# Altium PCB Copy of RT_SUPER_MK90.PCBdoc (part 3 of 3)
Units mil, origin at the board's own origin, x right, y up, seen from the top; angles counter-clockwise.
Board outline 1549.87 x 1549.87 mil, 4 copper layers (Top Layer, GND, PWR, Bottom Layer), stack 39.556 mil thick; 179 components, 119 nets, 506 pads, 207 vias.
Unrouted connection lines stored in the file: 7.
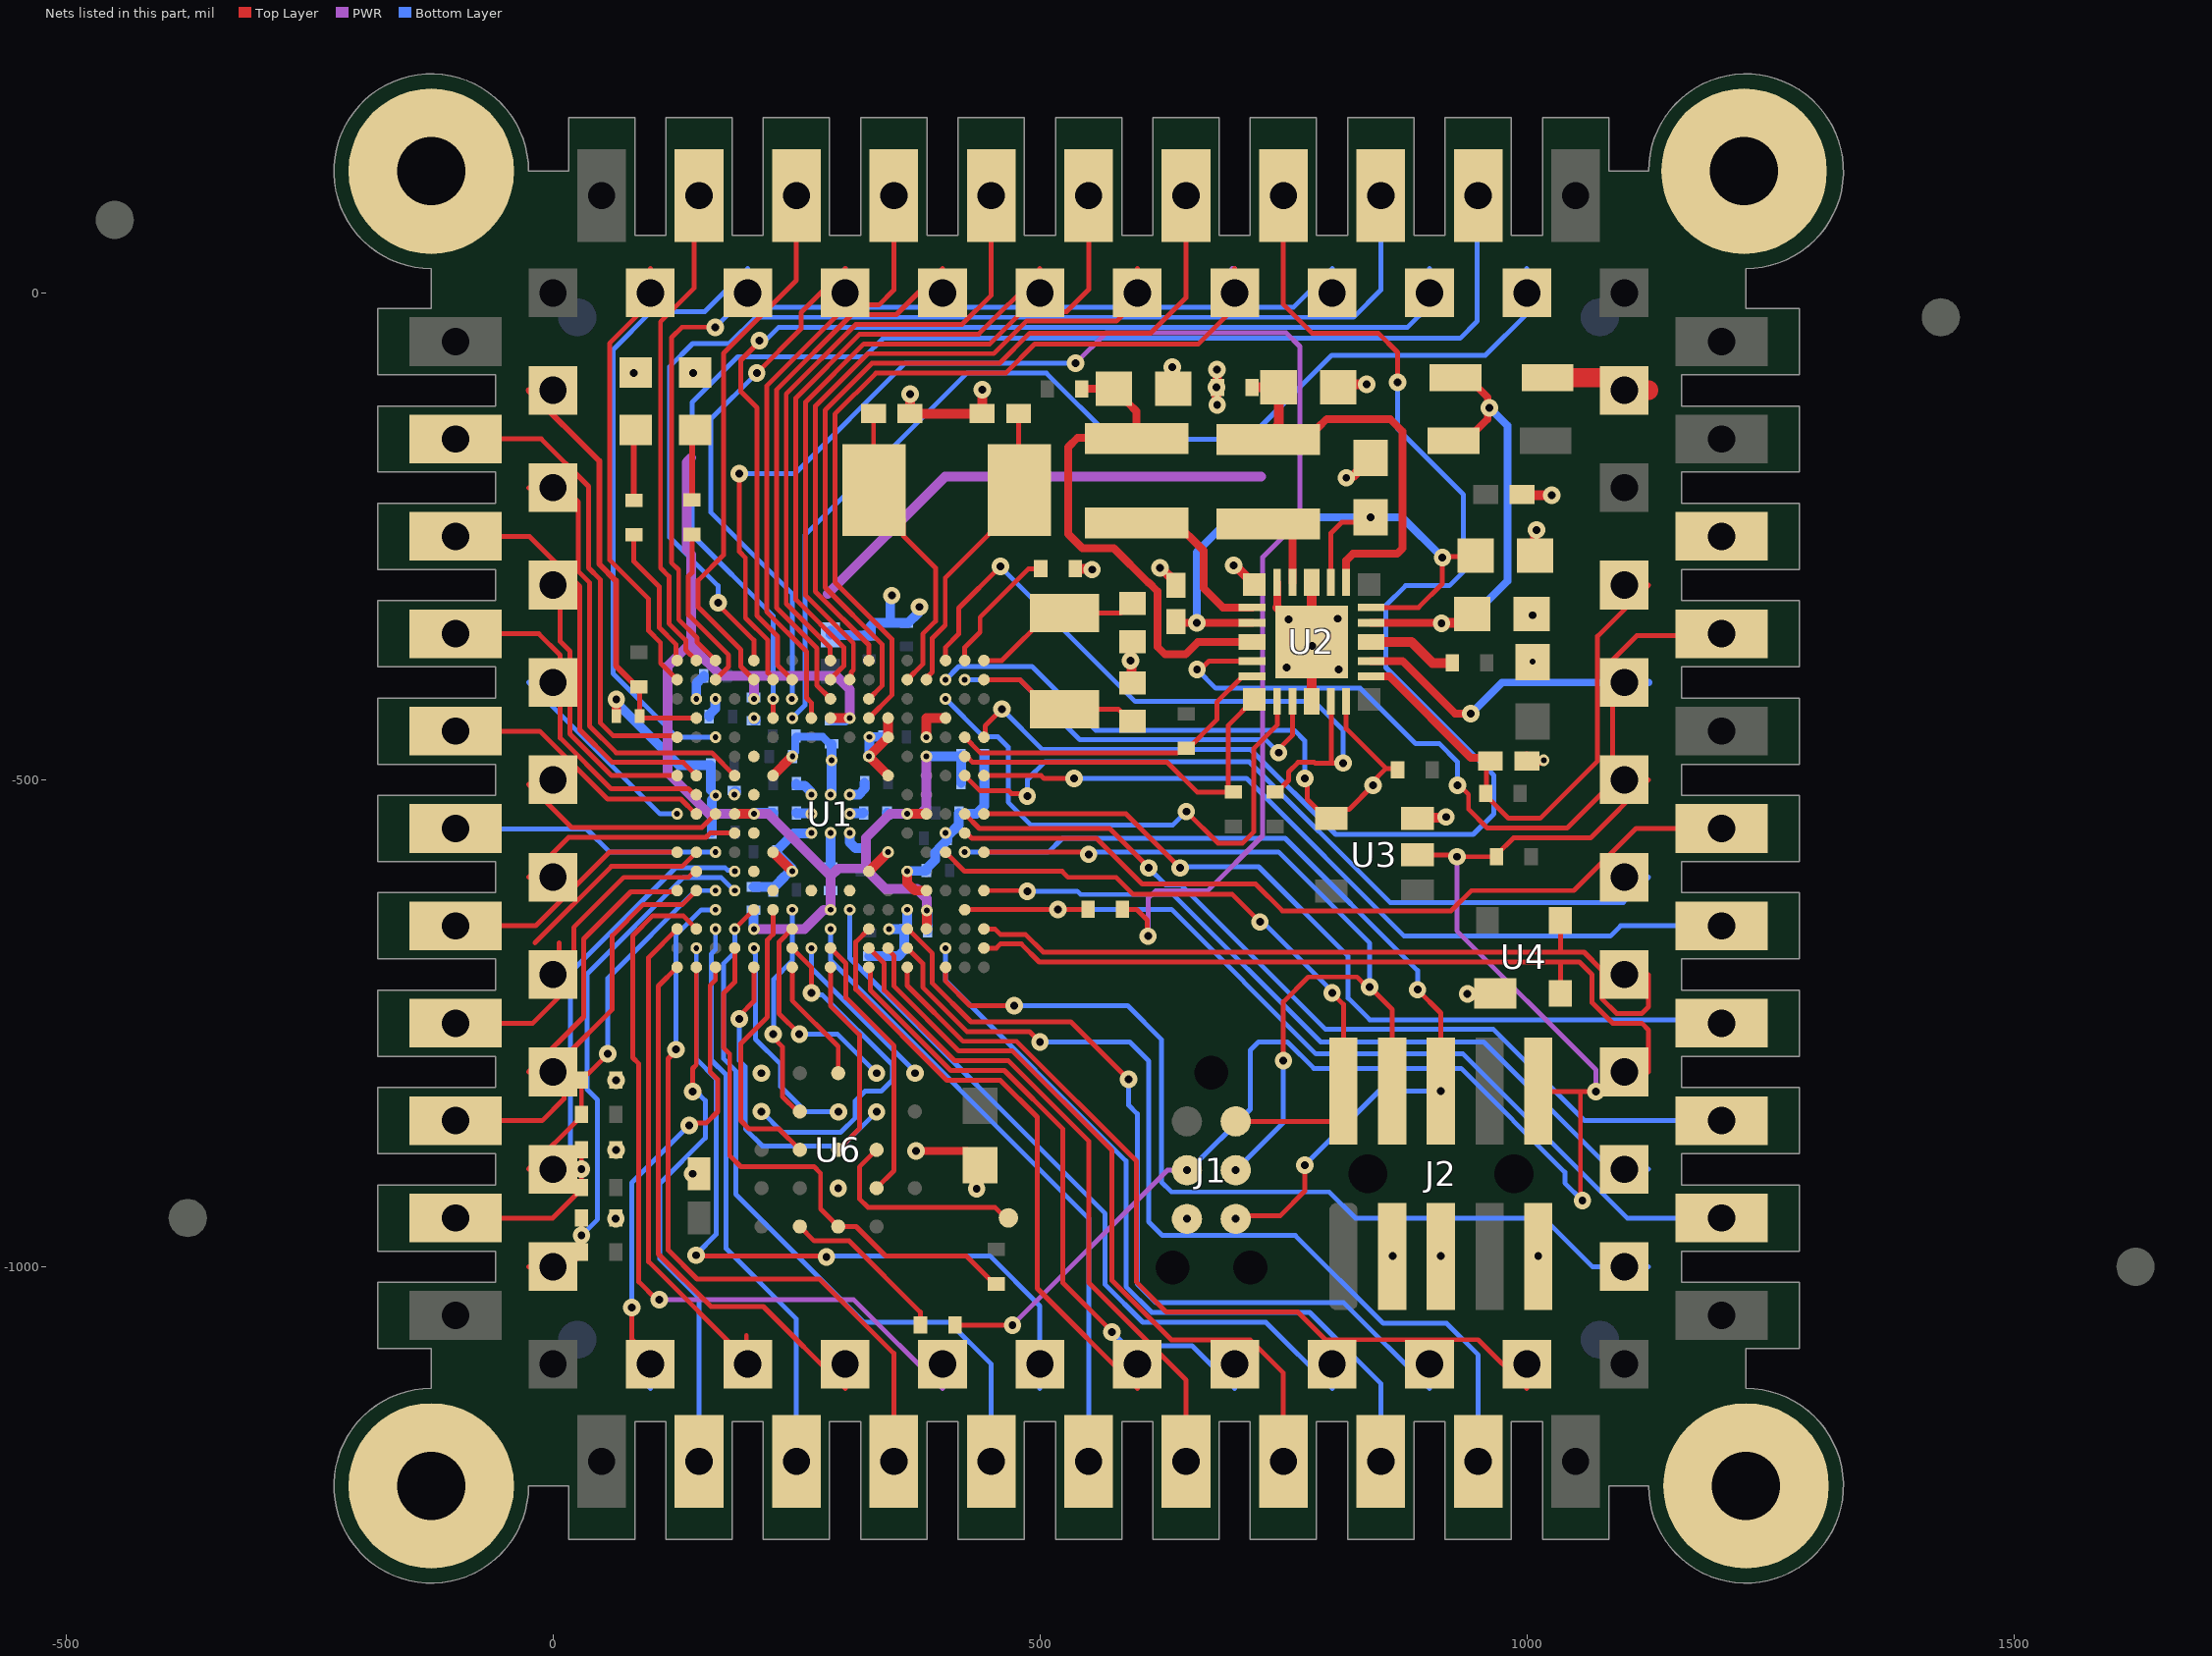
[diagram p4: the nets of this part, all layers, seen from the top]

## Via types
v1: diameter 18, hole 8, Top Layer to Bottom Layer, tented both sides, 124 vias
v2: diameter 12, hole 6, Top Layer to Bottom Layer, tented both sides, 83 vias

## Nets (pads, with @x,y where several pads share a name; then routed paths per layer and width w, separated by ;. In a path a pad name is that pad's centre, name@x,y a point inside that pad or via, vN(x,y) a via of type N, cw(c..) or ccw(c..) an arc to the next point about the centre after c; other vN are vias at no path point) (continued)
+VBATT_BU: C3.2 R6.1 T53.1 U2.13 | length 539.7
  Top Layer w5: C3.2@958.59,-482.13 958.59,-513.01 R6.1@957.6,-513.99 957.6,-515.96 981.22,-539.58 1013.56,-539.58 1072.49,-480.65 1072.49,-352.51 1125,-300
  Top Layer w8: U2.13@840,-393.82 858.9,-393.82 942.41,-477.34 953.73,-477.34 955.84,-479.45 C3.2@955.84,-482.13
+VIN: D1.1 T57.1 | length 109.1
  Top Layer w20: D1.1@1021.24,-87 1103.88,-87 1116.88,-100 1125,-100
+VREF: C6.2 R21.2 T1.1 U1.D2 | length 442
  Top Layer w5: R21.2@88.36,-404.45 89.04,-405.14 C6.2@89.04,-434.61 91.01,-436.57 U1.D2@147.2,-436.57
  Top Layer w6: T1.1@-25,-100 47.62,-172.62 47.62,-278.49 64.72,-295.58 64.72,-382.78 86.39,-404.45 R21.2@88.36,-404.45
ADC0_1: T74.1 U1.E3 | length 637.4
  Bottom Layer w5: v2(166.89,-456.11) 127.04,-456.11 61.83,-390.91 61.83,-58.17 101,-19 156,-19 200,25
ADC0_3: T75.1 U1.A2 | length 534.2
  Top Layer w5: U1.A2@147.2,-377.52 136.18,-366.5 136.18,-356.64 119.09,-339.54 119.09,-291.04 110.41,-282.37 110.41,-29.59 145.07,5.07 145.07,120.07 T75.1@150,125
ADC0_4: T73.1 U1.B5 | length 587.7
  Top Layer w5: U1.B5@206.26,-397.2 192.76,-383.7 192.76,-366.37 149.09,-322.7 149.09,-295.09 175,-269.18 175,-62 250,13 T73.1@250,125
ADC0_8: T2.1 U1.E1 | length 514.6
  Top Layer w5: T2.1@-122,-150 -12.03,-150 36.62,-198.65 36.62,-214.12 36.62,-282.34 48.53,-294.25 48.53,-441.49 61.97,-454.92 126.18,-454.92 U1.E1@127.52,-456.26
  Top Layer w6: T2.1@-125,-150 T2.1@-122,-150
ADC0_12: T76.1 U1.B1 | length 468.3
  Top Layer w5: 100,25 100,-10 58.12,-51.88 58.12,-274.14 98.16,-314.18 98.16,-346.9 110.41,-359.15 110.41,-380.1 U1.B1@127.52,-397.2
DM_MCU: T43.1 U1.T17 U4.2 | length 813.6
  Top Layer w5: U1.T17@442.48,-672.8 455.22,-672.8 459.37,-668.65 480.93,-668.65 499.35,-687.07 1032.78,-687.07 ; U4.2@1034.37,-719.37 1034.37,-688.67 1032.78,-687.07 ; 1125,-800 1125,-757.1 1117.9,-750 1088,-750 1066.79,-728.79 1066.79,-700 1053.86,-687.07 1032.78,-687.07
DP_MCU: T45.1 U1.R17 U4.3 | length 804.1
  Top Layer w5: U1.R17@442.48,-653.11 453.82,-653.11 459.37,-658.65 485.07,-658.65 503.49,-677.07 1034.37,-677.07 ; U4.3@1034.37,-644.56 1034.37,-677.07 ; 1125,-700 1125,-732.9 1117.9,-740 1092.14,-740 1076.79,-724.64 1076.79,-695.14 1058.72,-677.07 1034.37,-677.07
FC0_CLK: T5.1 U1.G1 | length 304.2
  Top Layer w5: T5.1@-14.71,-300 7.5,-322.21 7.5,-357.88 17.5,-367.88 17.5,-452.88 60.25,-495.63 U1.G1@127.52,-495.63 ; T5.1@0,-300 T5.1@10.29,-300
FC0_RXD: T3.1 U1.G4 | length 462
  Top Layer w5: T3.1@-25,-200 11.31,-200 26.12,-214.82 26.12,-285.98 37.5,-297.36 37.5,-444.6 65.03,-472.13 163.07,-472.13 U1.G4@186.57,-495.63
FC0_SSEL0: T6.1 U1.H2 | length 390.5
  Top Layer w5: T6.1@-125,-350 -14.53,-350 7.5,-372.03 7.5,-457.02 59.61,-509.13 139.13,-509.13 145.31,-515.32 U1.H2@147.2,-515.32
FC0_SSEL1: T7.1 U1.J1 | length 208.4
  Bottom Layer w5: T7.1@-25,-400 110,-535 v2(127.52,-535)
FC0_TXD: T4.1 U1.G2 | length 460.2
  Top Layer w5: T4.1@-125,-250 -24,-250 27.5,-301.5 27.5,-448.74 60.89,-482.13 133.7,-482.13 U1.G2@147.2,-495.63
FC1_CLK: T8.1 U1.J2 | length 307.4
  Top Layer w5: T8.1@-125,-450 -13.66,-450 56.07,-519.73 131.34,-519.73 146.61,-535 U1.J2@147.2,-535
FC1_RXD: T10.1 U1.L3 | length 302
  Bottom Layer w5: T10.1@-125,-550 -124.52,-550.48 34.52,-550.48 58.41,-574.37 v2(166.89,-574.37)
FC1_SSEL0: T9.1 U1.J3 | length 220.7
  Top Layer w5: T9.1@-25,-504.69 19.31,-549 152.89,-549 U1.J3@166.89,-535 ; T9.1@0,-504.69 T9.1@0,-500
FC1_SSEL1: T12.1 U1.L1 | length 283.8
  Top Layer w5: T12.1@-125,-650 -17.83,-650 57.8,-574.37 U1.L1@127.52,-574.37
FC1_TXD: T11.1 U1.K4 | length 230.3
  Top Layer w5: T11.1@-25,-600 16,-559 157.03,-559 161.35,-554.69 U1.K4@186.57,-554.69
FC2_CLK: T62.1 U1.A3 | length 1058.5
  Top Layer w5: v1(166.51,-35.52) 166.07,-35.08 132.45,-35.08 121.63,-45.9 121.63,-276.92 129.09,-284.37 129.09,-335.4 147.98,-354.29 147.98,-358.61 U1.A3@166.89,-377.52
  Bottom Layer w5: v1(166.51,-35.52) 187.5,-14.53 760.47,-14.53 800,25
FC2_SDA: T59.1 U1.D6 | length 1353.5
  Top Layer w5: U1.D6@225.94,-436.57 v2(225.94,-416.89)
  Bottom Layer w5: v2(225.94,-416.89) 225.94,-331.6 142.97,-248.63 142.97,-112.39 189.84,-65.51 320.06,-65.51 339.04,-46.52 931.34,-46.52 948.84,-29.02 948.84,123.84 T59.1@950,125
FC2_SSEL0: T58.1 U1.D7 | length 1131.5
  Bottom Layer w5: v2(245.63,-436.57) 258.66,-423.54 258.66,-248.66 425,-82.32 506.76,-82.32 574.68,-150.24 713.48,-150.24 799.72,-64 957.53,-64 1000,-21.53 1000,25
FC2_SSEL1: T60.1 U1.B7 | length 1118.8
  Top Layer w5: v1(212.04,-49.01) 212.04,-49.92 192.76,-69.2 192.76,-101.18 209.47,-117.89 209.47,-331.48 230.7,-352.71 230.7,-382.27 U1.B7@245.63,-397.2
  Bottom Layer w5: v1(212.04,-49.01) 214.52,-46.52 220.46,-46.52 231.46,-35.52 877.2,-35.52 900,-12.72 900,25
FC2_WS: T61.1 U1.A5 | length 1222.5
  Top Layer w5: v1(169.47,-318.19) 169.47,-319.77 206.26,-356.56 U1.A5@206.26,-377.52
  Bottom Layer w5: v1(169.47,-318.19) 169.47,-300.61 119.87,-251.02 119.87,-75.52 143.38,-52.02 181.08,-52.02 208.1,-25 822.1,-25 850,2.9 T61.1@850,125
FC3_CLK: T72.1 U1.C7 | length 545.1
  Top Layer w5: v1(209.26,-82.32) 254.9,-36.68 254.9,-20.1 300,25
  Bottom Layer w5: v1(209.26,-82.32) 162,-129.58 162,-225.27 245.63,-308.9 245.63,-416.42 v2(245.16,-416.89) ; T72.1@292.05,17.05 300,25
FC3_SDA: T70.1 U1.C9 | length 562.4
  Top Layer w5: U1.C9@285,-416.89 271,-402.89 271,-364.73 229.47,-323.2 229.47,-99.59 306.74,-22.32 352.68,-22.32 400,25
FC3_SSEL0: T68.1 U1.B9 | length 623.4
  Top Layer w5: U1.B9@285,-397.2 285,-396.61 298.5,-383.11 298.5,-363.94 249.47,-314.91 249.47,-107.87 315.02,-42.32 437.16,-42.32 500,20.52 500,25
FC3_SSEL1: T69.1 U1.A9 | length 672.6
  Top Layer w5: U1.A9@285,-377.52 284.43,-376.95 284.43,-364.02 239.47,-319.05 239.47,-103.73 310.88,-32.32 420.08,-32.32 450,-2.4 T69.1@450,125
FC3_WS: T71.1 U1.D8 | length 653.4
  Top Layer w5: U1.D8@265.32,-436.57 265.32,-420.78 260.39,-415.86 260.39,-368.26 219.47,-327.34 219.47,-95.45 302.59,-12.32 334.68,-12.32 350,3 T71.1@350,125
FC4_CLK: T64.1 U1.D11 | length 844.3
  Top Layer w5: U1.D11@324.37,-436.57 347.87,-413.07 347.87,-355.36 289.47,-296.96 289.47,-124.44 331.59,-82.32 464.82,-82.32 494.82,-52.32 662.7,-52.32 700,-15.02 700,25
  PWR w5: 697.6,25 700,25
FC4_SDA: T65.1 U1.C11 | length 874.7
  Top Layer w5: U1.C11@324.37,-416.89 337.87,-403.39 337.87,-360.89 279.47,-302.49 279.47,-120.3 327.45,-72.32 458.53,-72.32 489.6,-41.26 613.75,-41.26 650,-5.01 T65.1@650,125
FC4_SSEL0: T66.1 U1.A11 | length 692.2
  Top Layer w5: U1.A11@324.37,-377.52 324.37,-361.53 269.47,-306.63 269.47,-116.16 323.3,-62.32 452.66,-62.32 485.98,-29.01 578.55,-29.01 600,-7.56 600,25
FC4_SSEL1: T63.1 U1.E17 | length 1485.5
  Top Layer w5: U1.E17@442.48,-456.26 443.82,-454.92 443.82,-444.39 v1(460.93,-427.29) ; T63.1@750,125 750,-11.81 779.45,-41.26 847.44,-41.26 867.27,-61.09 v1(867.27,-91.87)
  Bottom Layer w5: v1(460.93,-427.29) 502.59,-468.94 716.56,-468.94 803.7,-556.08 944.93,-556.08 966.01,-535 966.01,-495.43 855.17,-384.59 855.17,-320.94 875.49,-300.61 920.39,-300.61 935,-286 935,-207.19 867.27,-139.46 v1(867.27,-91.87)
FC4_WS: T67.1 U1.B10 | length 767
  Top Layer w5: U1.B10@304.69,-397.2 306.02,-395.87 306.02,-389.73 308.5,-387.25 308.5,-359.8 259.47,-310.77 259.47,-112.02 319.16,-52.32 448.52,-52.32 481.84,-19.01 527.58,-19.01 550,3.42 T67.1@550,125
FC5_RXD: T42.1 U1.J16 | length 932.9
  Top Layer w5: U1.J16@422.8,-535 437.8,-550 571.61,-550 611.75,-590.14 v1(611.75,-590.51)
  Bottom Layer w5: v1(611.75,-590.51) 629,-607.76 644.73,-607.76 793.3,-756.33 965.66,-756.33 1059.33,-850 T42.1@1225,-850
FC5_SCK: T47.1 U1.G16 | length 805.8
  Top Layer w5: U1.G16@422.8,-495.63 438.54,-511.38 468,-511.38 470.68,-514.05 484.51,-514.05 v1(487,-516.54)
  Bottom Layer w5: v1(487,-516.54) 487.12,-516.42 487.12,-499.64 505.2,-481.56 715.03,-481.56 859.48,-626 1099,-626 1125,-600
FC5_SSEL0: T44.1 U1.J17 | length 897.7
  Top Layer w5: U1.J17@442.48,-535 588.49,-535 v1(644,-590.51)
  Bottom Layer w5: v1(644,-590.51) 645.15,-589.37 724.62,-589.37 816.5,-681.25 816.5,-724.21 838.62,-746.33 1221.33,-746.33 T44.1@1225,-750
FC5_TXD: T46.1 U1.G17 | length 855.2
  Top Layer w5: U1.G17@442.48,-495.63 501.11,-495.63 504.11,-498.63 v1(535,-498.63)
  Bottom Layer w5: v1(535,-498.63) 712.09,-498.63 873.96,-660.5 1085.74,-660.5 1096.24,-650 T46.1@1225,-650
FLEXSPI0A_D0: U1.T5 U6.D3 | length 224
  Top Layer w5: U6.D3@292.87,-840.63 292.87,-840.87 v1(293,-841)
  Bottom Layer w5: v2(206.26,-672.8) 207.6,-674.13 207.6,-678.83 208,-679.22 208,-766.33 233.87,-792.2 233.87,-815.07 259.8,-841 v1(293,-841)
FLEXSPI0A_D1: U1.U5 U6.D2 | length 331.5
  Top Layer w5: v1(191.5,-745.63) 191.5,-742.11 206.26,-727.35 U1.U5@206.26,-692.48 ; v1(332.24,-841) U6.D2@332.24,-840.63
  Bottom Layer w5: v1(191.5,-745.63) 191.5,-788.51 197.63,-794.65 197.63,-858.59 215.05,-876 297.24,-876 v1(332.24,-841)
FLEXSPI0A_D2: U1.P6 U6.C4 | length 303.5
  Top Layer w5: U1.P6@225.94,-633.43 225.94,-658.65 220.2,-664.4 220.2,-743.47 192.76,-770.91 192.76,-849.97 201.45,-858.65 232.16,-858.65 U6.C4@253.5,-880
FLEXSPI0A_D3: U1.P7 U6.D4 | length 228.2
  Top Layer w5: v1(226,-761) 226,-764.52 235.56,-774.08 235.56,-825.13 251.06,-840.63 U6.D4@253.5,-840.63
  Bottom Layer w5: v1(226,-761) 226.57,-760.43 226.57,-704.82 245.63,-685.76 v2(245.63,-633.43)
FLEXSPI0A_D4: U1.T7 U6.D5 | length 359.4
  Top Layer w5: U1.T7@245.63,-672.8 265.32,-692.48 v1(265.32,-719)
  Bottom Layer w5: v1(214.13,-840.63) 235.49,-861.98 295.35,-861.98 310.38,-846.95 310.38,-829.68 320.48,-819.58 337.26,-819.58 348.74,-808.09 348.74,-792.99 276.7,-720.95 267.26,-720.95 v1(265.32,-719)
FLEXSPI0A_D5: U1.U7 U6.E3 | length 128.3
  Top Layer w5: U1.U7@245.63,-692.48 245.63,-726.52 292.87,-773.77 U6.E3@292.87,-801.26
FLEXSPI0A_D6: U1.R7 U6.E2 | length 218
  Top Layer w5: U1.R7@245.63,-653.11 232.13,-666.61 232.13,-740.13 v1(253,-761)
  Bottom Layer w5: v1(253,-761) 291.98,-761 v1(332.24,-801.26)
FLEXSPI0A_D7: U1.T8 U6.E1 | length 174.2
  Top Layer w5: U1.T8@265.32,-674.69 U1.T8@265.32,-672.8
  Bottom Layer w5: v2(265.44,-672.93) 265.44,-693.24 371.61,-799.41 v1(371.61,-801.26)
FLEXSPI0A_DQS: U1.U9 U6.C3 | length 208.9
  Top Layer w5: U1.U9@285,-692.48 285,-732.15 314.69,-761.83 314.69,-858.19 U6.C3@292.87,-880
FLEXSPI0A_SCK: U1.T9 U6.B2 | length 281.1
  Top Layer w5: U1.T9@285,-672.8 300.87,-688.67 300.87,-723.8 350.24,-773.17 350.24,-901.37 U6.B2@332.24,-919.37
FLEXSPI0A_SS0_N: R9.1 U1.T4 U6.A3 | length 570.5
  Top Layer w5: U1.T4@186.57,-672.8 186.57,-707.79 175,-719.37 175,-774.95 181.5,-781.45 181.5,-886.03 192.76,-897.3 268.05,-897.3 274.76,-904.01 274.76,-940.62 U6.A3@292.87,-958.74 311.34,-958.74 341.6,-989 424.59,-989 453.31,-1017.72 R9.1@455.28,-1017.72
FLEXSPI0B_CLK: T20.1 U1.U3 | length 493.4
  Top Layer w5: T20.1@81,-1099.48 v1(81,-1042) ; 81,-1074.48 100,-1093.48 T20.1@100,-1100 ; v1(139.88,-854.84) 142.2,-852.52 157.34,-852.52 169.11,-840.75 169.11,-807.7 161.35,-799.94 161.35,-711.09 166.89,-705.55 U1.U3@166.89,-692.48
  Bottom Layer w5: v1(81,-1042) 81,-913.72 v1(139.88,-854.84) ; T20.1@98.5,-1123.5 T20.1@100,-1125
GND: C1.1 C2.2 C3.1 C4.1 C5.2 C6.1 C7.1 C8.2 C9.1 C10.1 C11.1 C12.1 C13.1 C14.1 C15.1 C16.1 C17.1 C18.1 C19.1 C20.1 C21.1 C22.1 C23.1 C24.1 C25.1 C26.1 C27.1 C28.1 C29.1 C30.1 C31.1 C32.1 C33.1 C34.1 C35.1 C36.1 C37.1 C38.1 C39.1 C40.1 C41.1 C42.2 C43.2 C44.2 C45.2 D3.C D4.C J1.5 J2.3 J2.5 J2.9 pad.2 R1.1 R15.1 R17.1 R18.1 T54.1 U1.C2 U1.C3 U1.D5 U1.D12 U1.D15 U1.E12 U1.E14 U1.F7 U1.F11 U1.G6 U1.G12 U1.H8 U1.H9 U1.H10 U1.J8 U1.J10 U1.K8 U1.K9 U1.K10 U1.L6 U1.L12 U1.M7 U1.M11 U1.M13 U1.N14 U1.P13 U2.9 U2.21 U2.23 U2.24 U2.25 U3.3 U4.1 U6.B3 U6.C1 U6.E5 | length 2098.9
  Top Layer w8: U6.C1@371.61,-880 v1(372.64,-881.03) 424.83,-881.03 438.54,-894.74 C42.2@438.54,-895.73 436.42,-897.85 436.42,-918.52 435,-919.94 v1(435,-920) ; U2.25@743.61,-323.02 U2.23@743.61,-297.43
  Top Layer w10: v1(64.5,-950.85) 64.72,-950.63 R18.1@64.72,-950 ; C6.1@65.04,-434.61 v1(65.03,-417.44) ; v1(83,-82.32) 83.67,-81.65 D3.C@84.93,-81.65 ; v1(143.95,-82.32) 144.62,-81.65 D4.C@145.87,-81.65 ; U1.G6@225.94,-495.63 U1.F7@245.57,-476 ; U1.L6@226.49,-574.37 U1.L6@225.94,-574.37 v2(245.63,-594.06) ; U1.F7@245.63,-475.94 245.94,-475.94 v2(246,-476) ; U1.M11@324.37,-594.06 v2(344.06,-574.37) ; U1.G12@344.06,-495.63 v2(324.37,-475.94) U1.E12@344.06,-456.26 U1.E12@344.06,-456.26 344,-436.63 U1.D12@344.06,-436.57 ; v2(363.74,-594.06) 363.74,-605.87 371.61,-613.74 U1.N14@383.43,-613.74 ; v1(366.57,-103.73) C19.1@366.57,-123.98 C11.1@440.67,-123.98 v1(440.67,-99.46) ; v2(383.43,-456.26) 383.43,-436.57 U1.D15@403.11,-436.57 ; R1.1@536.23,-283.22 552.65,-283.22 v1(553.51,-284.08) ; C44.2@595,-400.55 594.02,-399.57 594.02,-378.5 v1(593.03,-377.52) 593.03,-360.33 C45.2@595,-358.36 ; v1(623.4,-282.24) 624.42,-282.24 639.47,-297.28 C8.2@639.47,-300.24 ; v1(636,-76.1) 636,-97.44 C9.1@637.04,-98.47 C9.1@638.02,-99.46 ; v1(698.74,-279.74) 700.33,-279.74 U2.24@719.92,-299.33 ; U2.25@743.61,-323.02 U2.25@778.98,-358.39 ; U2.9@778.98,-419.41 U2.25@778.98,-361.94 ; U2.21@778.98,-297.36 U2.25@778.98,-358.39 ; v1(779.45,-362.42) U2.25@778.98,-361.94 ; C7.1@806.09,-96.89 809.04,-93.94 v1(835.62,-93.94) ; v1(814.54,-189.83) 816.07,-188.3 821.54,-188.3 839.48,-170.36 C5.2@839.48,-169.38 ; J2.3@861.67,-989.58 861.67,-989.33 v1(862,-989) ; U3.3@887.72,-539.58 888.43,-538.87 916.26,-538.87 v1(916.96,-538.17) ; J2.5@911.67,-989.58 v1(911.67,-988.91) ; v1(939,-720) 940.07,-721.07 965.68,-721.07 U4.1@967.37,-719.37 ; C4.1@999.11,-206.89 1000.11,-207.89 v1(1025.52,-207.89) ; C3.1@999.93,-480.65 C3.1@1003.86,-480.65 ; C3.1@999.93,-475.81 1003.86,-479.74 C3.1@1003.86,-480.65 ; C1.1@1004.99,-329.89 1006,-330.9 v1(1006,-331) ; C18.1@1006,-378.96 v2(1006,-378.47) ; C18.1@1006.24,-378.72 C18.1@1006.98,-377.98 ; C2.2@1008.4,-269.89 1008.4,-244.69 v1(1009.77,-243.32) ; J2.9@1011.67,-989.58 v1(1011.67,-988.91) ; v2(1017.22,-479.88) 1016.46,-480.65 C3.1@1003.86,-480.65 ; U2.25@778.98,-361.94 U2.25@778.98,-358.39
  Bottom Layer w5: C38.1@154.89,-395.24 C38.1@154.89,-395.08
  Bottom Layer w8: v2(246,-476) 246,-474.03 248.69,-471.34 248.69,-456.8 249.61,-455.88 276.91,-455.88 284.03,-463 C34.1@286,-463
  Bottom Layer w10: v1(65.03,-417.44) 61.78,-417.44 129.34,-485 C16.1@162,-485 162,-510.46 ; v2(147.2,-416.89) 147.2,-401.09 153.14,-395.16 154.81,-395.16 154.89,-395.08 C38.1@154.89,-393.27 ; C39.1@160.41,-435 160.41,-433.19 166.51,-427.09 166.51,-417.27 v2(166.89,-416.89) ; C40.1@162.92,-554.14 163,-554.06 C40.1@163,-553.84 163,-520.55 167,-516.54 v2(167,-516) ; C30.1@186.08,-512 C30.1@188.05,-512 ; C33.1@205.99,-439.29 C33.1@207.8,-439.29 ; C32.1@207.81,-610 C32.1@206,-610 C32.1@206,-610 224.89,-610.08 C24.1@226,-611.19 ; C24.1@226,-613 C24.1@226,-611.19 ; C29.1@250,-534 250.5,-534.5 264.82,-534.5 v2(265.32,-535) ; C21.1@250,-504 250,-505.81 250.08,-505.89 258.38,-505.89 264.93,-512.44 264.93,-514.93 v2(265.32,-515.32) ; v2(265.32,-554.69) 264.93,-555.07 247.12,-555.07 230,-572.19 C20.1@230,-574 230,-575.81 245.25,-591.06 245.25,-593.67 v2(245.63,-594.06) 245.25,-594.44 242.61,-594.44 233.87,-603.18 233.87,-603.32 C24.1@226,-611.19 ; C27.1@285,-589.74 v2(285,-554.69) ; v2(285,-515.32) 285,-514.77 285.98,-513.79 v2(285.98,-479.88) C34.1@286,-463 ; C10.1@285,-350.94 285,-347.01 289.42,-351.43 307,-351.43 307.32,-351.74 323.95,-351.74 324.03,-351.82 C36.1@324.57,-351.82 ; v2(304.69,-554.69) 304.69,-564.39 310.54,-570.24 C15.1@317.48,-570.24 ; v2(304.69,-535) 305.19,-534.5 318.5,-534.5 C28.1@319,-534 ; v2(304.69,-515.32) 304.93,-515.07 314.14,-515.07 320,-509.22 C22.1@320,-503 ; v2@323.95,-474.99 324.37,-475.4 v2(324.37,-475.94) 324.69,-475.63 324.69,-456.32 v2(325,-456) C41.1@339,-456 ; C12.1@325,-681 354.93,-681 360.79,-675.14 360.79,-657.08 360.6,-656.89 C31.1@360.6,-655.08 C31.1@360.6,-653.27 ; C36.1@326.46,-351.74 326.46,-341.96 329.47,-338.94 C37.1@363,-338.94 364.81,-338.94 374.72,-329.04 374.72,-323.93 v1(376.25,-322.4) ; v2(345.04,-653.11) 354.74,-653.11 354.82,-653.19 360.52,-653.19 C31.1@360.6,-653.27 ; 346.34,-338.94 346.34,-312.3 v1(347.87,-310.77) ; v2(363.74,-633.43) 363.74,-650.13 C31.1@360.6,-653.27 ; v2(363.74,-594.06) 364.23,-593.56 382.74,-593.56 C14.1@383.24,-593.07 383.24,-591.26 392.31,-582.18 392.31,-574.52 395.8,-571.03 395.8,-570.89 404.88,-561.81 C23.1@404.88,-560 C23.1@404.88,-558.19 ; v2(403.11,-554.69) 403.11,-556.42 C23.1@404.88,-558.19 ; C25.1@416.88,-534 C25.1@416.8,-534.84 ; C26.1@443.39,-475 C26.1@443,-475 C35.1@443,-503 443,-527 435,-535 416.96,-535 C25.1@416.8,-534.84 ; C23.1@404.88,-558.19 416.8,-546.27 C25.1@416.8,-534.84
  other v1: 651,-950.85 292.87,-919.37 143.41,-904.58 64.72,-880 64.72,-808.5 214.13,-801.26 806.66,-386.66 753.51,-384.69 755.48,-335.48 805.68,-334.49
  other v2: 186.4,-515.37 206.26,-436.57
HS_SPI_MISO: T14.1 U1.M2 | length 369.9
  Top Layer w5: T14.1@-125,-750 -20.64,-750 21.32,-708.04 21.32,-651.58 72.75,-600.15 139.21,-600.15 145.31,-594.06 U1.M2@147.2,-594.06
HS_SPI_MOSI: T15.1 U1.N1 | length 276.6
  Top Layer w5: T15.1@-25,-800 31.5,-743.5 31.5,-663.46 79.97,-614.99 126.27,-614.99 U1.N1@127.52,-613.74
HS_SPI_SCK: T13.1 U1.L2 | length 239.5
  Top Layer w5: -18.6,-667.5 59.91,-588.98 132.59,-588.98 U1.L2@147.2,-574.37 ; T13.1@0,-700 6.4,-693.6 6.4,-667.5
HS_SPI_SSEL0: T16.1 U1.N2 | length 439.2
  Top Layer w5: T16.1@-125,-850 -11.1,-850 11.31,-827.59 11.31,-785.44 61,-735.75 61,-659.95 92.95,-628 132.94,-628 U1.N2@147.2,-613.74
I3C0_PUR: R16.1 U1.B6 | length 1615.8
  Top Layer w5: v1(191.5,-185.51) 191.5,-265.76 197.63,-271.89 197.63,-333.79 220.7,-356.85 220.7,-390.06 225.94,-395.31 U1.B6@225.94,-397.2 ; R16.1@584.72,-633 599.11,-633 610.18,-644.07 610.18,-659.77 v1(610.98,-660.57)
  PWR w5: v1(536.49,-72.32) 567.81,-41 753,-41 767,-55 767,-233 728.57,-271.43 728.57,-557.58 672.4,-613.74 618.95,-613.74 610.98,-621.71 v1(610.98,-660.57)
  Bottom Layer w5: v1(191.5,-185.51) 248.38,-185.51 361.86,-72.02 536.19,-72.02 v1(536.49,-72.32)
I3C0_SCL: T41.1 U1.N17 | length 799.9
  Top Layer w5: U1.N17@442.48,-613.74 v1@486.02,-613.74
  Bottom Layer w5: v1(487,-614.32) 538.32,-614.32 541.76,-617.76 636.68,-617.76 788.24,-769.32 955.56,-769.32 1086.25,-900 1125,-900
I3C0_SDA: R16.2 T40.1 U1.P16 | length 966.4
  Top Layer w5: U1.P16@422.8,-633.43 423.22,-633 v1(518.51,-633) R16.2@549.28,-633 R16.2@549.28,-634.97
  Bottom Layer w5: v1(518.51,-633) 634.99,-633 783.47,-781.49 934.41,-781.49 1102.92,-950 T40.1@1225,-950
ISP0: R12.1 R15.2 T17.1 U1.N3 | length 379
  Top Layer w5: T17.1@-25,-899.86 29.28,-845.58 R12.1@29.28,-843.61 R15.2@29.28,-808.5 29.28,-806.54 33.67,-802.15 35.68,-802.15 v1(56.34,-781.49) ; T17.1@0,-900 T17.1@0,-899.86
  Bottom Layer w5: v1(56.34,-781.49) 56.34,-703.66 146.26,-613.74 v2(166.89,-613.74)
ISP1: R13.1 R17.2 T18.1 U1.M4 | length 629.9
  Top Layer w5: T18.1@-125,-950 -0.23,-950 29.28,-920.49 R13.1@29.28,-918.52 v1(29.28,-899.66) R17.2@29.28,-880
  Bottom Layer w5: v1(29.28,-899.66) 26.32,-899.66 18,-891.34 18,-698 125.76,-590.24 176.62,-590.24 179.1,-592.72 185.24,-592.72 v2(186.57,-594.06)
ISP2: R14.1 R18.2 T19.1 U1.N4 | length 574.8
  Top Layer w5: T19.1@-25,-1000 16.25,-1000 29.28,-986.97 R14.1@29.28,-985 v1(29.28,-967.93) R18.2@29.28,-950
  Bottom Layer w5: v1(29.28,-967.93) 45.85,-951.36 45.85,-828.66 35,-817.81 35,-699.31 134.07,-600.24 172.48,-600.24 185.98,-613.74 v2(186.57,-613.74)
MCLK: T48.1 U1.K16 | length 870.3
  Top Layer w5: U1.K16@422.8,-554.69 424.69,-554.69 430,-560 557.9,-560 604.91,-607.01 721.35,-607.01 748.9,-634.56 922.22,-634.56 943.04,-613.74 1048.26,-613.74 1112,-550 T48.1@1225,-550
NetC1_2: C1.2 D1.2 D2.2 U2.16 | length 488.8
  Top Layer w8: U2.16@840.09,-338.79 v1@911.67,-338.79 ; D2.2@924.63,-151.79 937.43,-151.79 959.75,-129.46 959.75,-119.8 v1(961.67,-117.89) 959.75,-115.97 959.75,-107.2 939.55,-87 D1.2@926.76,-87
  Top Layer w10: v1@911.67,-338.79 v1(912.33,-339.45) ; v1@912.33,-338.7 935.15,-338.7 C1.2@943.96,-329.89
  Bottom Layer w8: v1(912.33,-339.45) 936.55,-339.45 980,-296 980,-136.22 v1(961.67,-117.89)
NetC2_1: C2.1 C5.1 C8.1 U2.2 U2.17 U2.20 | length 677.6
  Top Layer w5: U2.20@798.66,-297.36 798.66,-246.75 809.96,-235.45 834.43,-235.45 v1(839.48,-230.4) ; U2.17@840,-322.95 888.8,-322.95 913.31,-298.44 v1(913.31,-271.86) ; v1@914.3,-270.88 946.38,-270.88 C2.1@947.37,-269.89
  Top Layer w8: C8.1@639.47,-337.64 640.53,-338.7 v1(661,-338.7) U2.2@717.95,-338.7
  Bottom Layer w8: v1(661,-338.7) 661,-266.02 696.62,-230.4 871.85,-230.4 v1(913.31,-271.86)
NetC7_2: C7.2 L2.2 R7.1 U2.19 | length 444.4
  Top Layer w5: C7.2@729.99,-96.89 C7.2@745.07,-96.89
  Top Layer w8: L2.2@735.32,-150.52 L2.2@734.48,-150.52 746.22,-138.77 785.16,-138.77 794.47,-129.46 859.49,-129.46 872.45,-142.42 872.45,-262.29 866.81,-267.93 821.46,-267.93 814.41,-274.97 U2.19@814.41,-297.36
  Top Layer w10: R7.1@717.72,-96.89 C7.2@729.99,-96.89 ; L2.2@729.99,-151.09 L2.2@729.99,-146.52 ; L2.2@734.48,-146.52 745.07,-135.93 C7.2@745.07,-96.89
NetC9_2: C9.2 L3.2 R10.1 U2.3 | length 534.5
  Top Layer w8: R10.1@543.05,-98.47 577,-98.47 590.71,-112.19 590.71,-113.17 599.2,-121.66 599.2,-146.52 597.14,-148.58 538.74,-148.58 528.91,-158.41 528.91,-247.47 543.74,-262.29 575.99,-262.29 610.98,-297.28 611.61,-297.28 620.63,-306.29 620.63,-363.31 628.55,-371.24 649.39,-371.24 662.24,-358.39 U2.3@717.95,-358.39
NetC11_2: C11.2 U1.B14 X2.2 | length 316.7
  Top Layer w5: U1.B14@383.43,-397.2 383.43,-395.31 389.61,-389.13 389.61,-354.39 402.75,-341.25 402.75,-292.49 448.04,-247.2 449.07,-247.2 479.07,-217.2 X2.2@479.07,-202.46 478.07,-201.45 C11.2@478.07,-123.98 ; C11.2@482,-123.98 C11.2@483.97,-122.01
NetC19_2: C19.2 U1.B13 X2.1 | length 311.6
  Top Layer w5: C19.2@329.17,-123.98 329.17,-202.16 359.47,-232.46 359.47,-249.08 392.75,-282.37 392.75,-337.11 379.61,-350.25 379.61,-381.33 U1.B13@363.74,-397.2
NetC44_1: C44.1 U1.B17 X1.2 | length 170.2
  Top Layer w5: U1.B17@442.48,-397.2 479.51,-397.2 509.59,-427.29 X1.2@525.34,-427.29 580.4,-427.29 593.03,-439.92 C44.1@595,-439.92
NetC45_1: C45.1 U1.A17 X1.1 | length 176.8
  Top Layer w5: U1.A17@442.48,-377.52 460.93,-377.52 509.59,-328.86 X1.1@525.34,-328.86 583.16,-328.86 593.03,-318.99 C45.1@595,-318.99
NetD3_A: D3.A R19.1 | length 73.1
  Top Layer w6: R19.1@83,-213 83,-142.64 D3.A@84.93,-140.71
NetD4_A: D4.A R20.1 | length 73.3
  Top Layer w6: R20.1@142.73,-212.68 142.73,-143.84 D4.A@145.87,-140.71
NetL2_1: L2.1 U2.22 | length 82.2
  Top Layer w8: L2.1@734.48,-233.13 747.54,-233.13 759.29,-244.88 U2.22@759.29,-297.36
NetL3_1: L3.1 U2.1 | length 178.6
  Top Layer w8: L3.1@599.2,-233.13 636.6,-233.13 668.09,-264.62 668.09,-303.22 687.83,-322.95 U2.1@717.95,-322.95
NetR1_2: R1.2 U1.A16 | length 133.9
  Top Layer w5: U1.A16@422.8,-377.52 422.8,-364.06 438.54,-348.31 438.54,-333.04 488.36,-283.22 R1.2@500.8,-283.22
NetR11_2: R11.2 U6.A4 | length 173.6
  Top Layer w5: U6.A4@253.5,-958.74 268.29,-973.52 304.18,-973.52 377.23,-1046.57 377.23,-1059.95 R11.2@377.28,-1060
NetR22_1: R22.1 U2.15 | length 92.2
  Top Layer w10: U2.15@840,-358.39 881.62,-358.39 903.23,-380 R22.1@923.28,-380
NetTP1_1: TP1.1 U6.C2 | length 218.7
  Top Layer w5: U6.C2@332.24,-880 314.69,-897.56 314.69,-930.38 323.3,-939 453.76,-939 464.61,-949.85 TP1.1@467.65,-949.85
PDM_CLK01: T22.1 U1.R1 | length 526.2
  Top Layer w5: U1.R1@127.52,-653.11 98.16,-682.47 98.16,-994.94 T22.1@198.65,-1095.43 ; 198.65,-1070.43 198.65,-1098.65 T22.1@200,-1100
PDM_CLK23: T24.1 U1.U1 | length 551.5
  Top Layer w5: U1.U1@127.52,-692.48 108.16,-711.84 108.16,-986.97 162.19,-1041 216,-1041 T24.1@300,-1125
PDM_CLK45: T26.1 U1.R2 | length 794.5
  Top Layer w5: v1(109,-1034) 106.58,-1034 88.16,-1015.58 88.16,-791.6 82,-785.44 82,-660.13 102.52,-639.61 133.7,-639.61 U1.R2@147.2,-653.11
  PWR w5: v1(109,-1034) 309,-1034 T26.1@400,-1125
PDM_CLK67: T28.1 U1.T2 | length 792.7
  Top Layer w5: v1(146.94,-988.28) 147.66,-989 279.77,-989 v1(280.79,-990.02)
  Bottom Layer w5: v1(146.94,-988.28) 146.94,-987.44 167.63,-966.75 167.63,-807.07 147.2,-786.64 v2(147.2,-672.8) ; v1(280.79,-990.02) 281.9,-988.91 448.5,-988.91 500,-1040.41 T28.1@500,-1125
PDM_DATA01: T21.1 U1.U2 | length 577.4
  Top Layer w5: v1(143.41,-820) 143.41,-796.39 147.2,-792.6 U1.U2@147.2,-692.48
  Bottom Layer w5: v1(143.41,-820) 146.93,-820 156.38,-829.45 156.38,-867.85 109.87,-914.35 109.87,-992.11 150,-1032.23 T21.1@150,-1225
PDM_DATA23: T23.1 U1.R3 | length 609.9
  Bottom Layer w5: v2(166.89,-653.11) 166.89,-674.4 162.54,-678.75 162.54,-787.84 177.63,-802.93 177.63,-981.32 250,-1053.68 T23.1@250,-1225
PDM_DATA45: T25.1 U1.P3 | length 790
  Top Layer w5: v1(126.18,-777.01) 126.18,-778.42 118.16,-786.44 118.16,-982.83 147.95,-1012.62 273.62,-1012.62 350,-1089 T25.1@350,-1225
  Bottom Layer w5: v1(126.18,-777.01) 126.18,-659.53 152.29,-633.43 v2(166.89,-633.43)
PDM_DATA67: T27.1 U1.P5 | length 769.9
  Top Layer w5: v2(186.57,-653.11) U1.P5@206.26,-633.43
  Bottom Layer w5: v2(186.57,-653.11) 186.57,-677.2 175,-688.78 175,-786.15 187.63,-798.79 187.63,-925.56 319.07,-1057 406.96,-1057 450,-1100.04 T27.1@450,-1225
PIO0_19: R19.2 U1.A1 | length 147.5
  Top Layer w5: R19.2@83,-248.43 83,-275.57 109.09,-301.66 109.09,-343.69 126.18,-360.78 126.18,-376.18 U1.A1@127.52,-377.52
PIO2_4: T37.1 U1.T13 | length 1004.7
  Top Layer w5: U1.T13@363.74,-672.8 379.61,-688.67 379.61,-713.05 425.07,-758.5 489.27,-758.5 v1(500.04,-769.28)
  Bottom Layer w5: v1(500.04,-769.28) 592.27,-769.28 611.75,-788.76 611.75,-953.88 625.8,-967.93 762.27,-967.93 852.43,-1058.09 917.5,-1058.09 950,-1090.59 T37.1@950,-1225
PIO2_5: T38.1 U1.U13 | length 899.2
  Top Layer w5: U1.U13@363.74,-692.48 363.74,-711.32 420.92,-768.5 475.94,-768.5 599.2,-891.77 599.2,-1015.96 629.72,-1046.47 764.7,-1046.47 793.16,-1074.94 949.94,-1074.94 T38.1@1000,-1125
PIO2_6: T39.1 U1.U15 | length 943.4
  Top Layer w5: U1.U15@403.11,-692.48 403.11,-706.83 428.29,-732 v1(473.62,-732)
  Bottom Layer w5: v1(473.62,-732) 590.13,-732 624.62,-766.49 624.62,-912.88 634.99,-923.24 797.09,-923.24 823.85,-950 1017.22,-950 1067.22,-1000 1125,-1000
PMIC_INTB: R2.1 U1.A15 U2.10 | length 726.7
  Top Layer w5: U1.A15@403.11,-377.52 403.11,-363.74 416.7,-350.15 416.7,-323.6 v1(459.37,-280.94) ; R2.1@741.38,-512.55 743.35,-512.55 755.38,-500.52 755.38,-491.8 765.04,-482.13 781.78,-482.13 782.4,-482.75 799.14,-482.75 ; U2.10@798.66,-419.41 799.14,-419.89 799.14,-482.75 ; v1(811.31,-482.75) 799.14,-482.75
  Bottom Layer w5: v1(459.37,-280.94) 597.95,-419.52 781.89,-419.52 811.31,-448.94 v1(811.31,-482.75)
PMIC_MODE0: U1.C15 U2.7 | length 571.3
  Top Layer w5: v1(650.31,-532.59) 682.7,-564.97 708.11,-564.97 719.38,-553.71 719.38,-482.82 719.38,-467.98 743.54,-443.81 U2.7@743.54,-419.41
  Bottom Layer w5: v2@402.99,-416.77 v2(403.11,-416.89) 442.1,-455.88 456.89,-455.88 467.37,-466.36 467.37,-523.01 490.63,-546.27 636.64,-546.27 v1(650.31,-532.59)
PMIC_MODE1: U1.B16 U2.8 | length 411.9
  Top Layer w5: v1(745.07,-472.13) 745.07,-468.71 759.29,-454.49 U2.8@759.29,-419.41
  Bottom Layer w5: v2(422.8,-397.2) 479.36,-397.2 541.1,-458.94 731.88,-458.94 v1(745.07,-472.13)
PMIC_ON: T52.1 U2.4 | length 870.8
  Top Layer w5: v1(661.34,-386.74) 664.86,-386.74 673.52,-378.07 U2.4@717.95,-378.07 ; v1(928.8,-505.66) 930.75,-505.66 940.07,-514.98 940.07,-530.13 959.52,-549.58 1041.19,-549.58 1088,-502.77 1088,-376.77 1112.77,-352 1223,-352 T52.1@1225,-350
  Bottom Layer w5: v1(661.34,-386.74) 680.6,-406 828.97,-406 885.89,-462.92 910.17,-462.92 928.8,-481.56 v1(928.8,-505.66)
PMIC_RESETN: R5.1 U1.B15 U2.11 U3.4 | length 674.2
  Top Layer w5: v1(771.88,-498.63) 774.37,-501.12 774.37,-519.73 794.22,-539.58 U3.4@799.14,-539.58 ; U3.4@799.93,-532.59 802.25,-530.27 817.49,-530.27 v1(842.1,-505.66) ; U2.11@814.41,-419.41 814.41,-447.51 855.3,-488.4 ; v1@842.45,-505.66 842.45,-501.8 846.73,-497.51 846.73,-496.97 855.3,-488.4 ; R5.1@867.25,-489.59 866.06,-488.4 855.3,-488.4
  Bottom Layer w5: v2(403.11,-397.2) 416.61,-383.7 491.91,-383.7 557.15,-448.94 761.11,-448.94 771.88,-459.71 v1(771.88,-498.63)
PMIC_SCL: R3.1 U1.E16 U2.5 | length 343.9
  Top Layer w5: U1.E16@422.8,-456.26 438.67,-472.13 641.03,-472.13 ; 641.05,-472.11 645.93,-472.11 R3.1@650.31,-467.72 ; R3.1@651.5,-468.5 681.67,-438.33 681.67,-420.26 706.67,-395.26 716.52,-395.26 U2.5@717.95,-393.82
PMIC_SDA: R4.1 U1.F16 U2.6 | length 399
  Top Layer w5: U1.F16@422.8,-475.94 424.69,-475.94 430.87,-482.13 630.91,-482.13 661.34,-512.55 R4.1@697.85,-512.55 ; R4.1@698.74,-512.55 R4.1@697.85,-512.55 ; U2.6@719.92,-417.44 693.46,-443.9 693.46,-508.16 R4.1@697.85,-512.55
RED_LED: R20.2 U1.B3 | length 173.3
  Top Layer w5: R20.2@142.73,-248.12 142.73,-287.31 139.09,-290.95 139.09,-330.63 180.39,-371.93 180.39,-383.7 U1.B3@166.89,-397.2
RST_3V3: J1.3 J2.10 R8.1 R11.1 T49.1 U3.2 | length 1618.6
  Top Layer w5: R11.1@412.72,-1060 v1(471.79,-1060) ; U3.2@887.72,-576.98 926.11,-576.98 v1(928.08,-578.95) R8.1@968.95,-578.95 968.95,-576.98 986.35,-559.58 1065.42,-559.58 1125,-500 ; J2.10@1011.67,-819.58 1012.09,-820 1055,-820 ; v1(1057,-932) 1055,-930 1055,-820 ; v1(1071,-820) 1055,-820
  PWR w5: v1(471.79,-1060) 630.94,-900.85 v1(651,-900.85) ; v1(928.08,-578.95) 928.08,-655.08 1071,-798 v1(1071,-820)
  Bottom Layer w5: v1(651,-900.85) 653.45,-900.85 716,-838.3 716,-777.66 724.39,-769.28 754.1,-769.28 781.21,-796.38 932.38,-796.38 1039,-903 1039,-914 v1(1057,-932)
SD_CLK: T34.1 U1.P10 | length 780.1
  Top Layer w5: T34.1@800,-1100 T34.1@800,-1090.64
  Bottom Layer w5: v2(304.69,-633.43) 304.69,-683.1 567,-945.42 567,-1018.41 605.59,-1057 732,-1057 T34.1@800,-1125
SD_CMD: T29.1 U1.R9 | length 681.7
  Bottom Layer w5: v2(285,-653.11) 285,-685.33 550,-950.33 T29.1@550,-1225
SD_D0: T30.1 U1.R11 | length 629.5
  Top Layer w5: U1.R11@324.37,-653.11 310.87,-666.61 310.87,-715.1 404.27,-808.5 459.37,-808.5 497.25,-846.39 497.25,-1022.25 T30.1@600,-1125
SD_D1: T31.1 U1.T11 | length 719.4
  Top Layer w5: U1.T11@324.37,-672.8 340.24,-688.67 340.24,-716.19 412.56,-788.5 467.65,-788.5 550,-870.85 550,-1016.29 650,-1116.29 T31.1@650,-1225
SD_D2: T32.1 U1.U11 | length 660.2
  Top Layer w5: U1.U11@324.37,-692.48 325.71,-693.82 325.71,-715.8 408.41,-798.5 463.51,-798.5 523.66,-858.65 523.66,-1016.66 v1(574,-1067)
  Bottom Layer w5: v1(574,-1067) 588.31,-1081.31 656.31,-1081.31 T32.1@700,-1125
SD_D3: T33.1 U1.T12 | length 800.1
  Top Layer w5: U1.T12@344.06,-672.8 344.06,-674.69 350.24,-680.87 350.24,-712.05 416.7,-778.5 471.79,-778.5 574,-880.71 574,-1014.16 634.84,-1075 715.91,-1075 750,-1109.09 T33.1@750,-1225
SD_DETECT_N: T36.1 U1.R13 | length 867.5
  Top Layer w5: U1.R13@363.74,-653.11 364.33,-653.11 389.61,-678.39 389.61,-708.91 429.21,-748.5 531.8,-748.5 v1(591,-807.7)
  Bottom Layer w5: v1(591,-807.7) 591,-834.05 600,-843.05 600,-1018 619,-1037 812,-1037 T36.1@900,-1125
SD_RESET_N: T35.1 U1.T15 | length 832.4
  Bottom Layer w5: v2(402.99,-672.8) 402.99,-705.99 588.31,-891.31 588.31,-1020.45 614.86,-1047 777.05,-1047 850,-1119.95 T35.1@850,-1225
SWCLK: J1.4 J2.4 U1.L17 | length 894.9
  Top Layer w5: U1.L17@442.48,-574.37 547.87,-574.37 v1(550,-576.5) ; v1(750,-788.51) 750,-728.03 775.58,-702.45 825.61,-702.45 835.94,-712.78 v1(838.62,-712.78) 861.67,-735.83 J2.4@861.67,-819.58
  Bottom Layer w5: v1(550,-576.5) 552.49,-574.01 744.97,-574.01 838.62,-667.67 v1(838.62,-712.78) ; v1(701,-900.85) 750,-851.85 v1(750,-788.51)
SWIO: J1.2 J2.2 U1.L15 | length 698.3
  Top Layer w5: U1.L15@403.11,-574.37 422.74,-594 522.76,-594 528.91,-600.15 578.22,-600.15 595.7,-617.63 697.57,-617.63 v1(725.9,-645.95) ; J1.2@701,-850.85 799.67,-850.85 811.67,-838.85 J2.2@811.67,-819.58 811.67,-730.62 v1(800,-718.95)
  Bottom Layer w5: v1(725.9,-645.95) 729.03,-645.95 800,-716.92 v1(800,-718.95)
SWO: J1.6 J2.6 U1.L16 | length 941.5
  Top Layer w5: v1(701,-950.85) 704.39,-947.47 746.91,-947.47 771.88,-922.5 v1(771.88,-895.73) ; v1(887.72,-715.5) 911.67,-739.45 v1(911.67,-819.58)
  Bottom Layer w5: v2(422.8,-574.37) 508.54,-574.37 522.91,-560 751.84,-560 887.72,-695.88 v1(887.72,-715.5) ; v1(771.88,-895.73) 848.03,-819.58 v1(911.67,-819.58)
TEMP_SENSE: T51.1 U2.14 | length 320.6
  Top Layer w8: U2.14@840,-378.07 872.45,-378.07 926.36,-431.98 v1(942.52,-431.98)
  Bottom Layer w8: v1(942.52,-431.98) 974.5,-400 1125,-400
VDD_CORE: C26.2 C27.2 C28.2 C29.2 C30.2 C31.2 C32.2 C33.2 C34.2 C35.2 R7.2 U1.C5 U1.D9 U1.F14 U1.J4 U1.J14 U1.P9 U1.R5 U1.R14 | length 2013.5
  Top Layer w10: U1.J4@186.57,-535 v2(206.26,-535) ; U1.D9@283.93,-436.57 U1.D9@285,-436.57 v2(304.69,-436.57) ; v2(363.74,-535) 381.35,-535 381.67,-534.68 U1.J14@381.67,-534.32 ; U1.R14@383.43,-653.11 383.81,-652.73 383.81,-651.31 384,-651.12 v2(384,-634) ; R7.2@680.31,-96.89 R7.2@680.31,-94.92 ; v1(681.28,-96.74) 681.28,-114.97 v1(681.98,-114.97) ; v1@681.67,-81.65 681.98,-81.96 R7.2@681.98,-96.07 ; R7.2@681.98,-96.68 R7.2@681.98,-96.07 ; R7.2@682,-96.66 682.28,-96.38 R7.2@681.98,-96.07
  PWR w10: 141.98,-169.16 137.37,-173.77 137.37,-264.14 141.98,-268.75 141.98,-359.12 ; v2(206.26,-653.11) 258.43,-653.11 277.73,-633.81 284.62,-633.81 v2(285,-633.43) 285,-598.98 ; v2(206.26,-416.89) 206.26,-393.27 ; 281.98,-309.16 402.36,-188.78 727.17,-188.78 ; v2(304.69,-436.57) 304.69,-407.05 290.91,-393.27 206.26,-393.27 ; v2(383.43,-475.94) 383.43,-529.14 377.57,-535 v2(363.74,-535) 346.02,-535 321.42,-559.61 321.42,-590.12 320.43,-591.1 ; v2(384,-634) 384.06,-633.94 384.06,-622.25 373.58,-611.77 341.1,-611.77 320.43,-591.1 ; 141.98,-359.12 146,-363.13 146,-366.68 172.58,-393.27 206.26,-393.27 ; 141.98,-359.12 117.68,-383.43 117.68,-492.68 160,-535 v2(206.26,-535) 221.02,-535 285,-598.98 ; 285,-598.98 292.87,-591.1 320.43,-591.1
  Bottom Layer w10: C30.2@186.08,-535 186.16,-534.92 194.13,-534.92 194.44,-534.62 205.88,-534.62 v2(206.26,-535) 207.34,-535 208.34,-534 C29.2@226,-534 ; C33.2@205.28,-415.36 206.26,-416.35 v2(206.26,-416.89) ; C33.2@205.71,-415.21 205.79,-415.29 C33.2@205.99,-415.29 ; C32.2@205.99,-634 205.91,-634.08 206.13,-634.08 206.13,-652.98 v2(206.26,-653.11) v2@206.26,-652.57 ; v2(285,-633.43) C27.2@285,-613.74 ; C34.2@286,-439 C34.2@286,-439 300.29,-439.08 302.41,-436.96 304.3,-436.96 v2(304.69,-436.57) ; C28.2@343,-534 344,-535 v2(363.74,-535) ; v2(383.43,-475.94) 418.06,-475.94 C26.2@419,-475 C35.2@419,-503 ; v2(384,-634) 384,-634.54 384.6,-635.14 C31.2@384.6,-655.08
  other v1: 681.67,-78.65
VDDIO0: U1.F5 U1.H5 U1.K5 U1.M5 U1.N6 U1.N8 U1.N10
pads on no net: F1.1 F2.1 F3.1 F4.1 F5.1 F6.1 F7.1 F8.1 J1.A J1.B J1.C J2.7 J2.8 J2.A T77.1 T78.1 T79.1 T80.1 T81.1 T82.1 T83.1 T84.1 T85.1 T86.1 T88.1 T92.1 U1.A7 U1.B2 U1.C1 U1.E2 U1.F4 U1.G3 U1.G15 U1.J15 U1.M14 U1.N15 U1.T1 U1.T3 U1.T16 U1.U16 U1.U17 U3.1 U6.A2 U6.A5 U6.B1 U6.B5 U6.C5

## Polygon pours and split planes (outlines as drawn)
+3v3 on PWR "+3V3_L03_P003" (solid, remove dead copper, pour order 3): -324.25,-1338 1329,-1338 1329,219 -324.25,219
VDD_CORE on PWR "VDD_CORE_L03_P002" (solid, remove dead copper, pour order 2): 183.62,-675.75 183.62,-546.81 77.32,-546.81 77.32,-67 732.83,-67 732.83,-195 399.17,-195 399.17,-337.17 399.17,-674.76
GND on GND "GND_L02_P000" (solid, remove dead copper, pour order 0): -568.35,346.89 -568.35,-1466.1 1390,-1466.1 1390,346.89
GND on Bottom Layer "GND_L04_P004" (solid, remove dead copper, pour order 4): -309,310 -309,-1482 1329,-1482 1329,310

## Keep-outs
Keep-Out Layer:
  the board outline again, w1

## Silkscreen, mask and mechanical layers (free items; w line width, h text height)
Top Overlay:
  text "59" at 927,57 h50
  text "76" at 74,-43 h50
  text "58" at 975,-43 h50
  text "1" at 13,-116 h50
  text "2" at -87,-166 h50
  text "40" at 1141,-966 h50
  text "39" at 1043,-1015 h50
  text "20" at 78,-1088 h50
  text "21" at 129,-1189 h50
Bottom Overlay:
  text "W" at -871,573 h300
  text "Super Monkey" at 511,-160 h125
  text "RT685 Audio Platorm" at 528.83,-244.5 h75
  text "M" at 1041,-451 h700
  text "REV C" at 906,-583 h175
  text "2022-01-06" at 442,-988 h80
[8] Board Outline:
  drawing of 306 lines, arcs and shapes, not listed